# EAGLE board pfeffer_main_circuit (EAGLE 8.0.0)
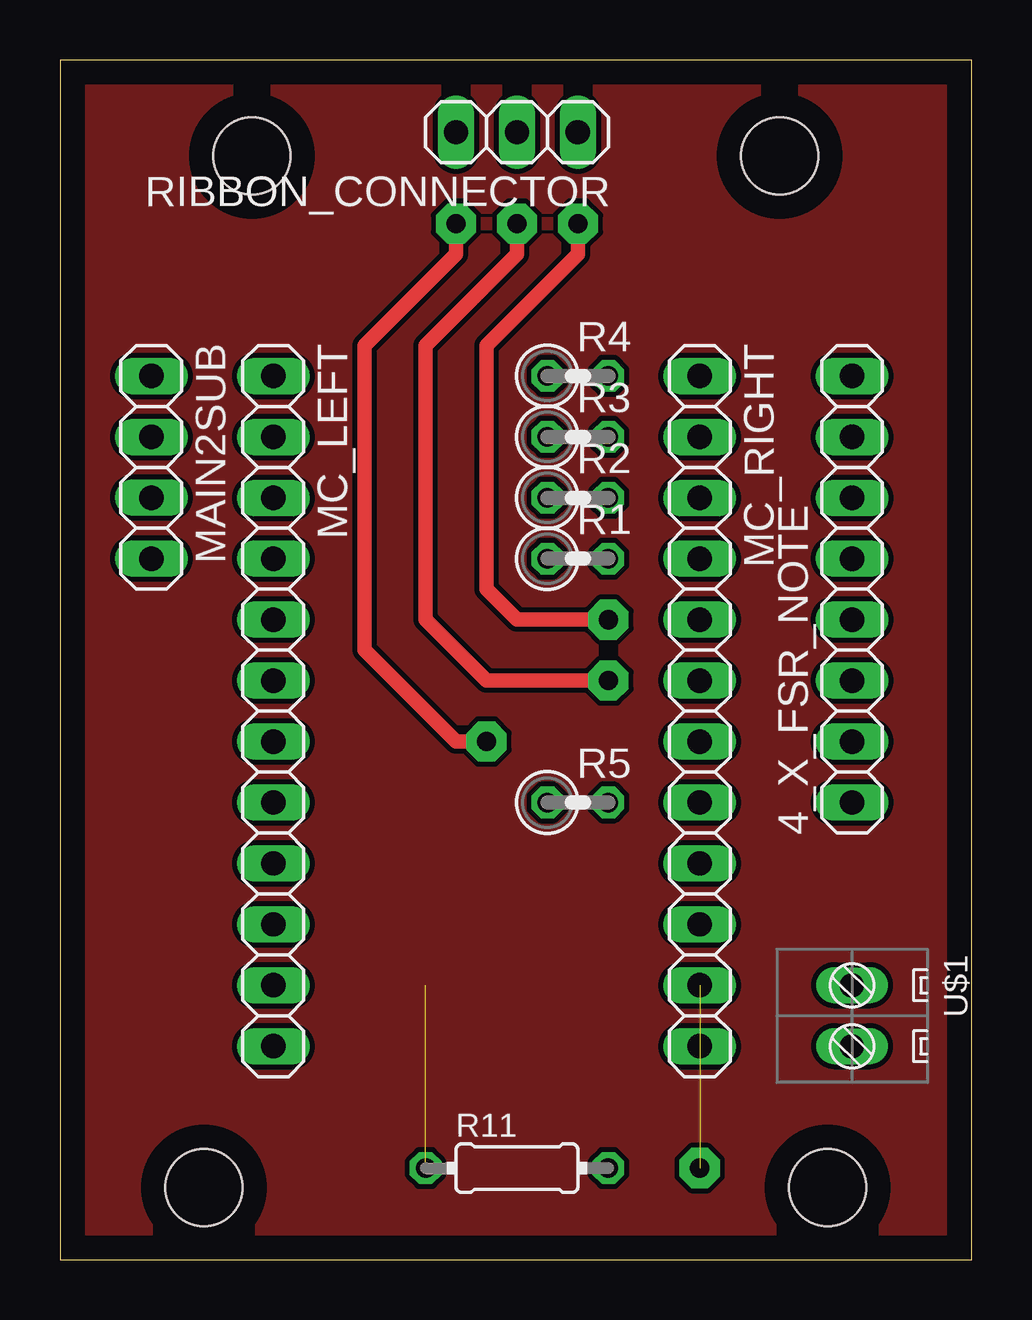
[diagram p0: board, top side]
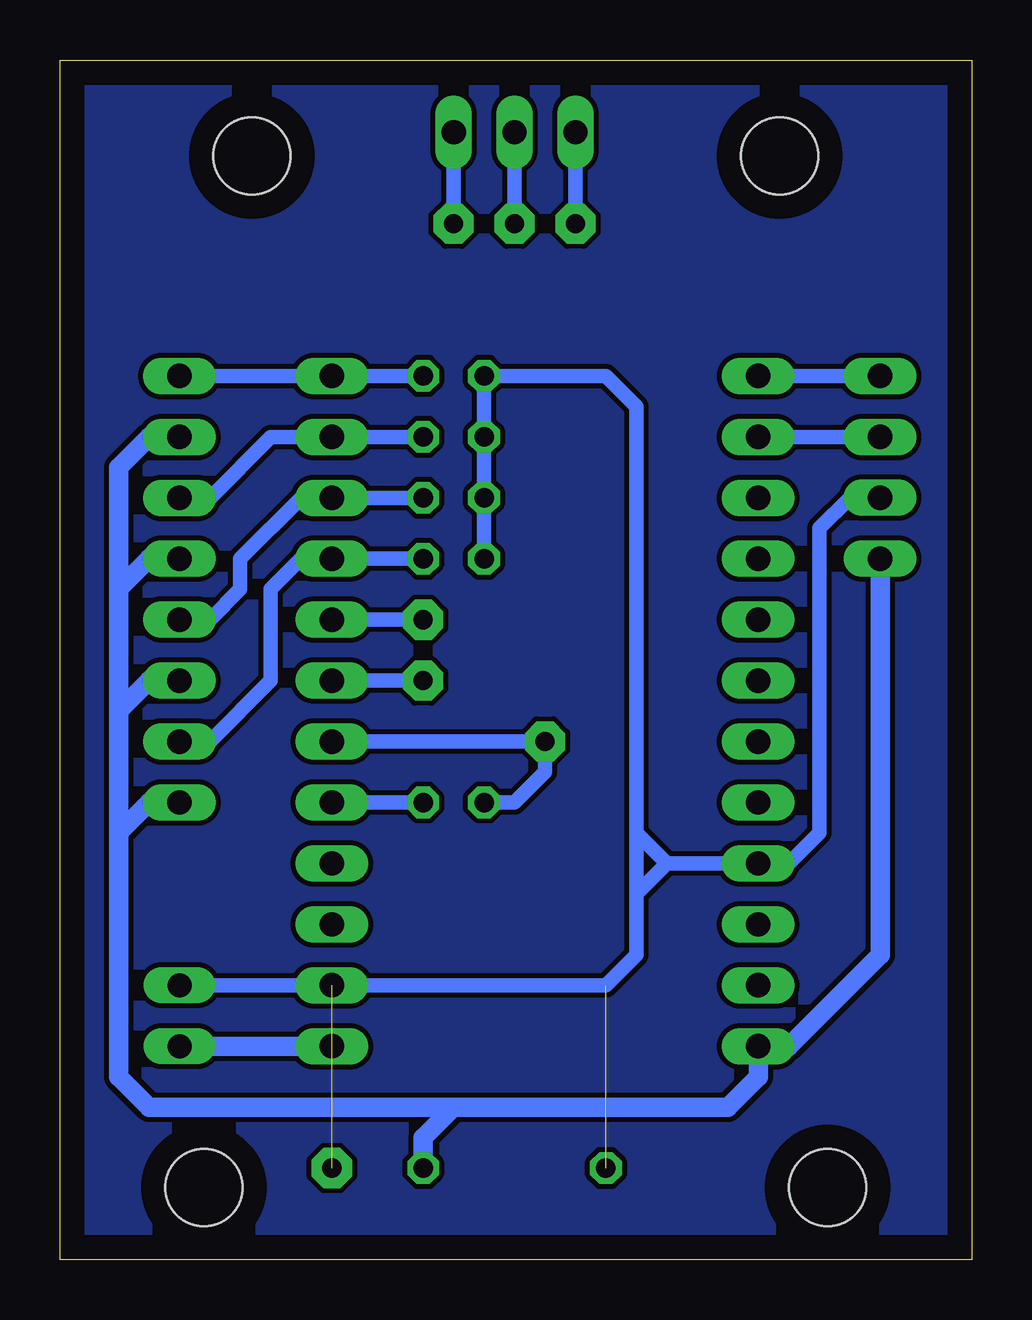
[diagram p1: board, bottom side, seen from below]

Size 38 x 50 mm. Coordinates in mm from the lower left corner, seen from the top.
Outline: 0,0 38,0 38,50 0,50 0,0
Copper layers (1*16): Top 0.035mm / dielectric 1.5mm / Bottom 0.035mm
Design rules "default": minimum track width 10mil, minimum drill 24mil, track to track 8mil, track to pad 8mil, pad to pad 8mil, via to via 8mil, smd to smd 8mil, copper to edge 40mil, drill to drill 8mil, minimum pad ring 10mil, minimum via ring 8mil, stop-mask expansion 4mil, vias tented up to drill 0mil, thermal gap 10mil
Holes 3.2 mm at 8,46 32,3 6,3 30,46

## Footprints (pad centres in the part's own frame; a part is rotated, then mirrored left to right if it is on the bottom)
1X08 = drill 1.016 long: 1 -8.89,0; 2 -6.35,0; 3 -3.81,0; 4 -1.27,0; 5 1.27,0; 6 3.81,0; 7 6.35,0; 8 8.89,0
1X04 = drill 1.016 long: 1 -3.81,0; 2 -1.27,0; 3 1.27,0; 4 3.81,0
1X12 = drill 1.016 long: 1 -13.97,0; 2 -11.43,0; 3 -8.89,0; 4 -6.35,0; 5 -3.81,0; 6 -1.27,0; 7 1.27,0; 8 3.81,0; 9 6.35,0; 10 8.89,0; 11 11.43,0; 12 13.97,0
0207/2V = drill 0.813 octagon: 1 -1.27,0; 2 1.27,0
0204/7 = drill 0.813 octagon: 1 -3.81,0; 2 3.81,0
1X03 = drill 1.016 long: 1 -2.54,0; 2 0,0; 3 2.54,0
DS308-2.54-02P = drill 1 long: 1 -1.27,0; 2 1.27,0

## Placement (x,y rotation side)
4_X_FSR_NOTE  [1X08]  33.02,27.94 90 top
MAIN2SUB  [1X04]  3.81,33.02 270 top
MC_LEFT  [1X12]  8.89,22.86 270 top
MC_RIGHT  [1X12]  26.67,22.86 270 top
R1  10k  [0207/2V]  21.59,29.21 0 top
R2  10k  [0207/2V]  21.59,31.75 0 top
R3  10k  [0207/2V]  21.59,34.29 0 top
R4  10k  [0207/2V]  21.59,36.83 0 top
R5  4.6k  [0207/2V]  21.59,19.05 0 top
R11  24  [0204/7]  19.05,3.81 0 top
RIBBON_CONNECTOR  [1X03]  19.05,46.99 180 top
U$1  DS308-02  [DS308-2.54-02P]  33.02,10.16 270 top

## Library data of the parts
4_X_FSR_NOTE MAIN2SUB MC_LEFT MC_RIGHT RIBBON_CONNECTOR = pinhead
R1-R5 R11 = rcl
U$1 = myDegsonConnectors

## Nets
GND: MAIN2SUB.3 MC_LEFT.9 MC_RIGHT.11 R1.1 R2.1 R3.1 R4.1 R11.1 U$1.1
N$1: 4_X_FSR_NOTE.2 MC_RIGHT.4 R1.2
N$2: 4_X_FSR_NOTE.4 MC_RIGHT.3 R2.2
N$3: 4_X_FSR_NOTE.6 MC_RIGHT.2 R3.2
N$4: 4_X_FSR_NOTE.8 MC_RIGHT.1 R4.2
N$5: MC_RIGHT.12 U$1.2
N$6: MAIN2SUB.1 MC_LEFT.1
N$7: MC_RIGHT.5 RIBBON_CONNECTOR.1
N$9: MC_RIGHT.6 RIBBON_CONNECTOR.2
N$10: MC_RIGHT.7 R5.1 RIBBON_CONNECTOR.3
N$11: MC_RIGHT.8 R5.2
N$19: MAIN2SUB.2 MC_LEFT.2
VCC: 4_X_FSR_NOTE.1 4_X_FSR_NOTE.3 4_X_FSR_NOTE.5 4_X_FSR_NOTE.7 MAIN2SUB.4 MC_LEFT.12 R11.2

## Tracks (layer width: path | path; a pad name or v marks a point on that pad's centre or on a via)
GND  (via drill 0.8 pad 1.68)  (2 unrouted)
  Bottom 0.61: R1.1 R2.1 R3.1 R4.1 15.24,36.83 13.97,35.56 13.97,17.78 | MAIN2SUB.3 5.08,31.75 6.35,30.48 6.35,17.78 7.62,16.51 MC_LEFT.9 12.7,16.51 | U$1.1 MC_RIGHT.11 15.24,11.43 13.97,12.7 13.97,15.24 | 12.7,16.51 13.97,17.78 | 13.97,15.24 12.7,16.51 | 13.97,17.78 13.97,15.24
  other vias: 26.67,3.81
N$1
  Bottom 0.61: R1.2 MC_RIGHT.4 27.94,29.21 29.21,27.94 29.21,24.13 31.75,21.59 4_X_FSR_NOTE.2
N$2
  Bottom 0.61: 4_X_FSR_NOTE.4 31.75,26.67 30.48,27.94 30.48,29.21 27.94,31.75 MC_RIGHT.3 R2.2
N$3
  Bottom 0.61: 4_X_FSR_NOTE.6 31.75,31.75 29.21,34.29 MC_RIGHT.2 R3.2
N$4
  Bottom 0.61: R4.2 MC_RIGHT.1 4_X_FSR_NOTE.8
N$5
  Bottom 0.813: U$1.2 MC_RIGHT.12
N$6
  Bottom 0.61: MAIN2SUB.1 MC_LEFT.1
N$7  (via drill 0.8 pad 1.68)
  Top 0.61: v21.59,43.18 21.59,41.91 17.78,38.1 17.78,27.94 19.05,26.67 v22.86,26.67
  Bottom 0.61: RIBBON_CONNECTOR.1 v21.59,43.18 | v22.86,26.67 MC_RIGHT.5
N$9  (via drill 0.8 pad 1.68)
  Top 0.61: v19.05,43.18 19.05,41.91 15.24,38.1 15.24,26.67 17.78,24.13 v22.86,24.13
  Bottom 0.61: RIBBON_CONNECTOR.2 v19.05,43.18 | v22.86,24.13 MC_RIGHT.6
N$10  (via drill 0.8 pad 1.68)
  Top 0.61: v16.51,43.18 16.51,41.91 12.7,38.1 12.7,25.4 16.51,21.59 v17.78,21.59
  Bottom 0.61: RIBBON_CONNECTOR.3 v16.51,43.18 | MC_RIGHT.7 v17.78,21.59 17.78,20.32 19.05,19.05 R5.1
N$11
  Bottom 0.61: R5.2 MC_RIGHT.8
N$12
  pour Bottom: 0,49.53 0,0 38.1,0 38.1,49.53
N$13
  pour Top: 0,49.53 0,0 38.1,0 38.1,49.53
N$19
  Bottom 0.61: MAIN2SUB.2 MC_LEFT.2
VCC
  Bottom 0.813: 4_X_FSR_NOTE.7 34.29,34.29 35.56,33.02 35.56,27.94 | 21.59,6.35 10.16,6.35 8.89,7.62 MC_LEFT.12 7.62,8.89 3.81,12.7 MAIN2SUB.4 | 35.56,22.86 35.56,27.94 | 35.56,17.78 35.56,22.86 | 4_X_FSR_NOTE.5 34.29,29.21 35.56,27.94 | 4_X_FSR_NOTE.3 34.29,24.13 35.56,22.86 | 4_X_FSR_NOTE.1 34.29,19.05 35.56,17.78 | 21.59,6.35 22.86,5.08 R11.2 | 21.59,6.35 34.29,6.35 35.56,7.62 35.56,17.78